# EAGLE board Imprimir (EAGLE 6.3)
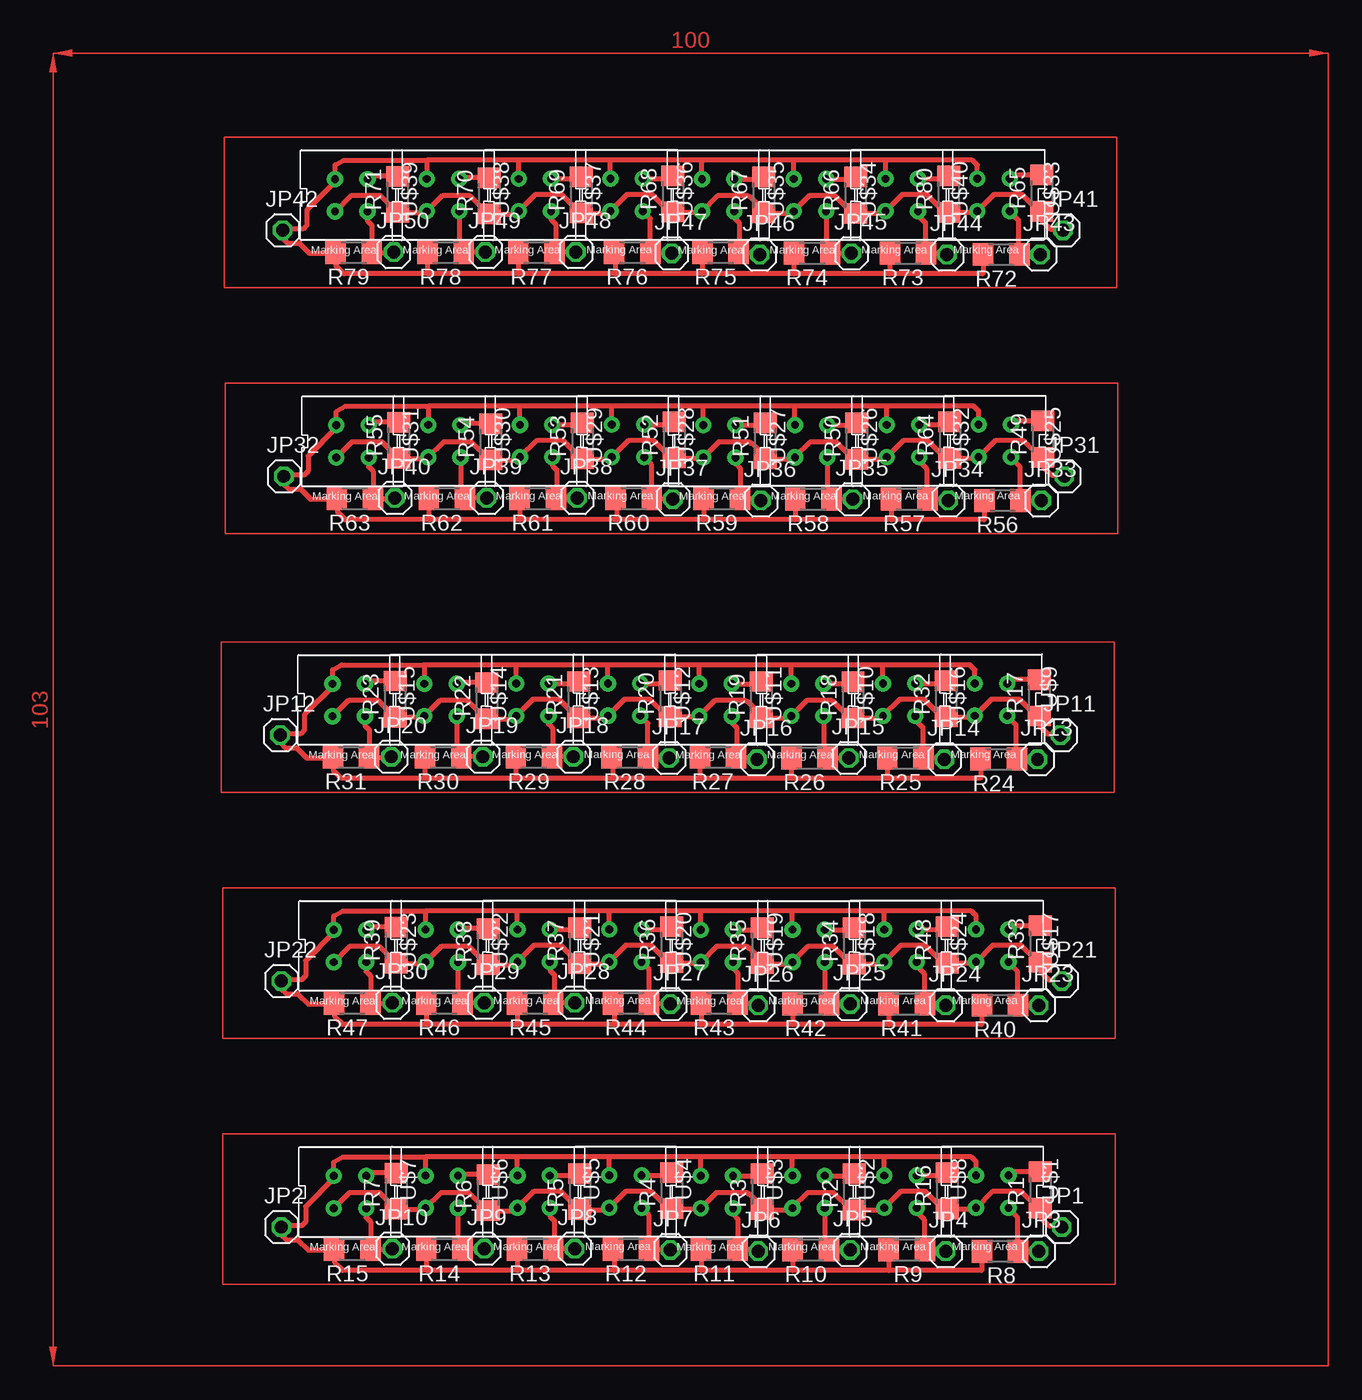
[diagram p0: board, top side]
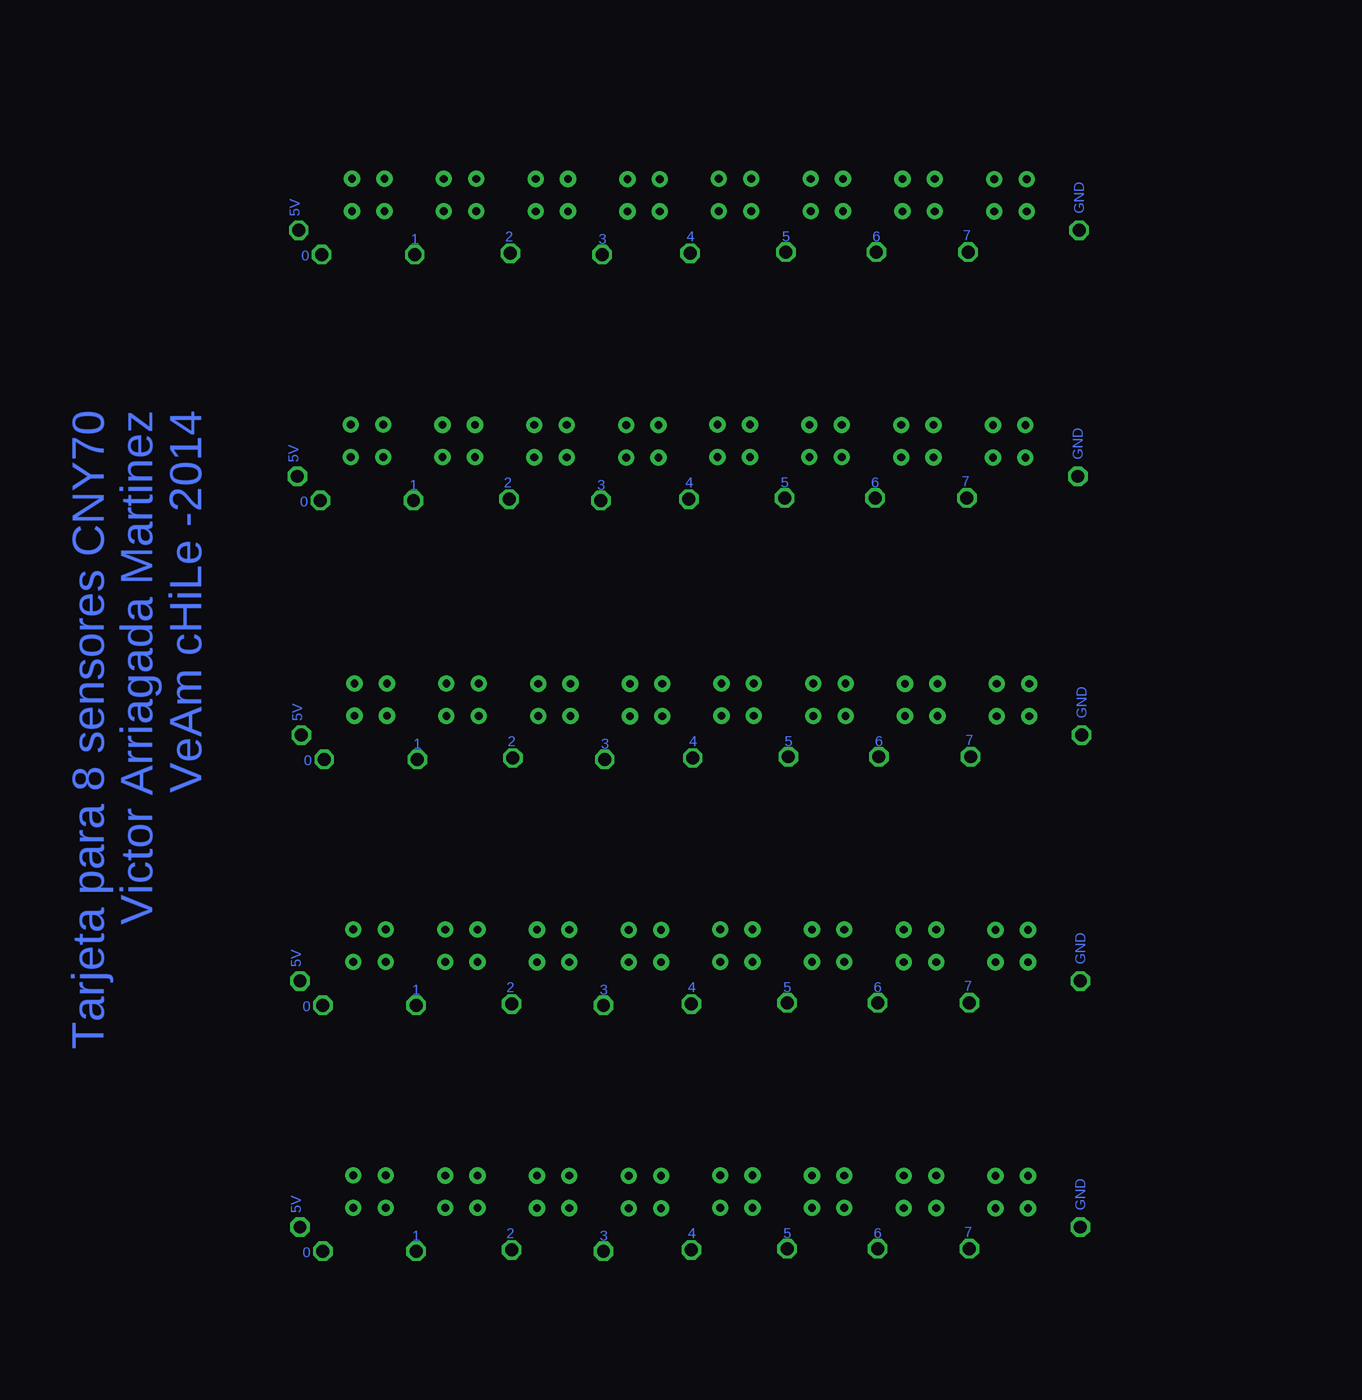
[diagram p1: board, bottom side, seen from below]

No outline drawn. Coordinates in mm, seen from the top.
Copper layers (1*16): Top 0.035mm / dielectric 1.5mm / Bottom 0.035mm
Design rules "default": minimum track width 10mil, minimum drill 24mil, track to track 8mil, track to pad 8mil, pad to pad 8mil, via to via 8mil, smd to smd 8mil, copper to edge 40mil, drill to drill 8mil, minimum pad ring 10mil, minimum via ring 8mil, stop-mask expansion 4mil, vias tented up to drill 0mil, thermal gap 10mil

## Footprints (pad centres in the part's own frame; a part is rotated, then mirrored left to right if it is on the bottom)
1X01 = drill 1.016 octagon: 1 0,0
R1206 = smd 1.6 x 1.803: 1 -1.422,0; 2 1.422,0
4 = drill 0.61 pad 1.27: A -1.27,1.27; C 1.27,-1.27; E 1.27,1.27; K -1.27,-1.27

## Placement (x,y rotation side)
JP1  5V  [1X01]  74.1,9.9 0 top
JP2  GND  [1X01]  12.9,9.9 0 top
JP3  D0  [1X01]  72.3,8 0 top
JP4  D1  [1X01]  65,8 0 top
JP5  D2  [1X01]  57.5,8.1 0 top
JP6  D3  [1X01]  50.3,8 0 top
JP7  D4  [1X01]  43.4,8.1 0 top
JP8  D5  [1X01]  35.9,8.2 0 top
JP9  D6  [1X01]  28.8,8.2 0 top
JP10  [1X01]  21.6,8.2 0 top
JP11  5V  [1X01]  74,48.5 0 top
JP12  GND  [1X01]  12.8,48.5 0 top
JP13  D0  [1X01]  72.2,46.6 0 top
JP14  D1  [1X01]  64.9,46.6 0 top
JP15  D2  [1X01]  57.4,46.7 0 top
JP16  D3  [1X01]  50.2,46.6 0 top
JP17  D4  [1X01]  43.3,46.7 0 top
JP18  D5  [1X01]  35.8,46.8 0 top
JP19  D6  [1X01]  28.7,46.8 0 top
JP20  [1X01]  21.5,46.8 0 top
JP21  5V  [1X01]  74.1,29.2 0 top
JP22  GND  [1X01]  12.9,29.2 0 top
JP23  D0  [1X01]  72.3,27.3 0 top
JP24  D1  [1X01]  65,27.3 0 top
JP25  D2  [1X01]  57.5,27.4 0 top
JP26  D3  [1X01]  50.3,27.3 0 top
JP27  D4  [1X01]  43.4,27.4 0 top
JP28  D5  [1X01]  35.9,27.5 0 top
JP29  D6  [1X01]  28.8,27.5 0 top
JP30  [1X01]  21.6,27.5 0 top
JP31  5V  [1X01]  74.3,68.8 0 top
JP32  GND  [1X01]  13.1,68.8 0 top
JP33  D0  [1X01]  72.5,66.9 0 top
JP34  D1  [1X01]  65.2,66.9 0 top
JP35  D2  [1X01]  57.7,67 0 top
JP36  D3  [1X01]  50.5,66.9 0 top
JP37  D4  [1X01]  43.6,67 0 top
JP38  D5  [1X01]  36.1,67.1 0 top
JP39  D6  [1X01]  29,67.1 0 top
JP40  [1X01]  21.8,67.1 0 top
JP41  5V  [1X01]  74.2,88.1 0 top
JP42  GND  [1X01]  13,88.1 0 top
JP43  D0  [1X01]  72.4,86.2 0 top
JP44  D1  [1X01]  65.1,86.2 0 top
JP45  D2  [1X01]  57.6,86.3 0 top
JP46  D3  [1X01]  50.4,86.2 0 top
JP47  D4  [1X01]  43.5,86.3 0 top
JP48  D5  [1X01]  36,86.4 0 top
JP49  D6  [1X01]  28.9,86.4 0 top
JP50  [1X01]  21.7,86.4 0 top
R1  220  [R1206]  72.43,12.82 90 top
R2  220  [R1206]  57.83,12.66 90 top
R3  220  [R1206]  50.63,12.68 90 top
R4  220  [R1206]  43.51,12.76 90 top
R5  220  [R1206]  36.31,12.68 90 top
R6  220  [R1206]  29.11,12.6 90 top
R7  220  [R1206]  21.91,12.72 90 top
R8  20k  [R1206]  69.26,8.01 180 top
R9  20k  [R1206]  61.94,8.11 180 top
R10  20k  [R1206]  54.42,8.11 180 top
R11  20k  [R1206]  47.24,8.16 180 top
R12  20k  [R1206]  40.32,8.16 180 top
R13  20k  [R1206]  32.8,8.16 180 top
R14  20k  [R1206]  25.68,8.16 180 top
R15  20k  [R1206]  18.46,8.16 180 top
R16  220  [R1206]  65.13,12.74 90 top
R17  220  [R1206]  72.33,51.42 90 top
R18  220  [R1206]  57.73,51.26 90 top
R19  220  [R1206]  50.53,51.28 90 top
R20  220  [R1206]  43.41,51.36 90 top
R21  220  [R1206]  36.21,51.28 90 top
R22  220  [R1206]  29.01,51.2 90 top
R23  220  [R1206]  21.81,51.32 90 top
R24  20k  [R1206]  69.16,46.61 180 top
R25  20k  [R1206]  61.84,46.71 180 top
R26  20k  [R1206]  54.32,46.71 180 top
R27  20k  [R1206]  47.14,46.76 180 top
R28  20k  [R1206]  40.22,46.76 180 top
R29  20k  [R1206]  32.7,46.76 180 top
R30  20k  [R1206]  25.58,46.76 180 top
R31  20k  [R1206]  18.36,46.76 180 top
R32  220  [R1206]  65.03,51.34 90 top
R33  220  [R1206]  72.43,32.12 90 top
R34  220  [R1206]  57.83,31.96 90 top
R35  220  [R1206]  50.63,31.98 90 top
R36  220  [R1206]  43.51,32.06 90 top
R37  220  [R1206]  36.31,31.98 90 top
R38  220  [R1206]  29.11,31.9 90 top
R39  220  [R1206]  21.91,32.02 90 top
R40  20k  [R1206]  69.26,27.31 180 top
R41  20k  [R1206]  61.94,27.41 180 top
R42  20k  [R1206]  54.42,27.41 180 top
R43  20k  [R1206]  47.24,27.46 180 top
R44  20k  [R1206]  40.32,27.46 180 top
R45  20k  [R1206]  32.8,27.46 180 top
R46  20k  [R1206]  25.68,27.46 180 top
R47  20k  [R1206]  18.46,27.46 180 top
R48  220  [R1206]  65.13,32.04 90 top
R49  220  [R1206]  72.63,71.72 90 top
R50  220  [R1206]  58.03,71.56 90 top
R51  220  [R1206]  50.83,71.58 90 top
R52  220  [R1206]  43.71,71.66 90 top
R53  220  [R1206]  36.51,71.58 90 top
R54  220  [R1206]  29.31,71.5 90 top
R55  220  [R1206]  22.11,71.62 90 top
R56  20k  [R1206]  69.46,66.91 180 top
R57  20k  [R1206]  62.14,67.01 180 top
R58  20k  [R1206]  54.62,67.01 180 top
R59  20k  [R1206]  47.44,67.06 180 top
R60  20k  [R1206]  40.52,67.06 180 top
R61  20k  [R1206]  33,67.06 180 top
R62  20k  [R1206]  25.88,67.06 180 top
R63  20k  [R1206]  18.66,67.06 180 top
R64  220  [R1206]  65.33,71.64 90 top
R65  220  [R1206]  72.53,91.02 90 top
R66  220  [R1206]  57.93,90.86 90 top
R67  220  [R1206]  50.73,90.88 90 top
R68  220  [R1206]  43.61,90.96 90 top
R69  220  [R1206]  36.41,90.88 90 top
R70  220  [R1206]  29.21,90.8 90 top
R71  220  [R1206]  22.01,90.92 90 top
R72  20k  [R1206]  69.36,86.21 180 top
R73  20k  [R1206]  62.04,86.31 180 top
R74  20k  [R1206]  54.52,86.31 180 top
R75  20k  [R1206]  47.34,86.36 180 top
R76  20k  [R1206]  40.42,86.36 180 top
R77  20k  [R1206]  32.9,86.36 180 top
R78  20k  [R1206]  25.78,86.36 180 top
R79  20k  [R1206]  18.56,86.36 180 top
R80  220  [R1206]  65.23,90.94 90 top
U$1  CNY70  [4]  68.65,12.68 270 top
U$2  CNY70  [4]  54.25,12.66 270 top
U$3  CNY70  [4]  47.05,12.65 270 top
U$4  CNY70  [4]  39.88,12.68 270 top
U$5  CNY70  [4]  32.68,12.67 270 top
U$6  CNY70  [4]  25.48,12.66 270 top
U$7  CNY70  [4]  18.28,12.65 270 top
U$8  CNY70  [4]  61.45,12.67 270 top
U$9  CNY70  [4]  68.55,51.28 270 top
U$10  CNY70  [4]  54.15,51.26 270 top
U$11  CNY70  [4]  46.95,51.25 270 top
U$12  CNY70  [4]  39.78,51.28 270 top
U$13  CNY70  [4]  32.58,51.27 270 top
U$14  CNY70  [4]  25.38,51.26 270 top
U$15  CNY70  [4]  18.18,51.25 270 top
U$16  CNY70  [4]  61.35,51.27 270 top
U$17  CNY70  [4]  68.65,31.98 270 top
U$18  CNY70  [4]  54.25,31.96 270 top
U$19  CNY70  [4]  47.05,31.95 270 top
U$20  CNY70  [4]  39.88,31.98 270 top
U$21  CNY70  [4]  32.68,31.97 270 top
U$22  CNY70  [4]  25.48,31.96 270 top
U$23  CNY70  [4]  18.28,31.95 270 top
U$24  CNY70  [4]  61.45,31.97 270 top
U$25  CNY70  [4]  68.85,71.58 270 top
U$26  CNY70  [4]  54.45,71.56 270 top
U$27  CNY70  [4]  47.25,71.55 270 top
U$28  CNY70  [4]  40.08,71.58 270 top
U$29  CNY70  [4]  32.88,71.57 270 top
U$30  CNY70  [4]  25.68,71.56 270 top
U$31  CNY70  [4]  18.48,71.55 270 top
U$32  CNY70  [4]  61.65,71.57 270 top
U$33  CNY70  [4]  68.75,90.88 270 top
U$34  CNY70  [4]  54.35,90.86 270 top
U$35  CNY70  [4]  47.15,90.85 270 top
U$36  CNY70  [4]  39.98,90.88 270 top
U$37  CNY70  [4]  32.78,90.87 270 top
U$38  CNY70  [4]  25.58,90.86 270 top
U$39  CNY70  [4]  18.38,90.85 270 top
U$40  CNY70  [4]  61.55,90.87 270 top

## Library data of the parts
JP1-JP50 = pinhead
R1-R80 = rcl
U$1-U$40 = cny70

## Nets
N$1: R1.2 U$1.A
N$2: R2.2 U$2.A
N$3: R3.2 U$3.A
N$4: R4.2 U$4.A
N$5: R5.2 U$5.A
N$6: R6.2 U$6.A
N$7: R7.2 U$7.A
N$8: JP10.1 R15.1 U$7.E
N$9: JP9.1 R14.1 U$6.E
N$10: JP8.1 R13.1 U$5.E
N$11: JP7.1 R12.1 U$4.E
N$12: JP6.1 R11.1 U$3.E
N$13: JP5.1 R10.1 U$2.E
N$14: JP4.1 R9.1 U$8.E
N$15: JP3.1 R8.1 U$1.E
N$16: JP1.1 R1.1 R2.1 R3.1 R4.1 R5.1 R6.1 R7.1 R16.1 U$1.C U$2.C U$3.C U$4.C U$5.C U$6.C U$7.C U$8.C
N$17: JP2.1 R8.2 R9.2 R10.2 R11.2 R12.2 R13.2 R14.2 R15.2 U$1.K U$2.K U$3.K U$4.K U$5.K U$6.K U$7.K U$8.K
N$18: R16.2 U$8.A
N$30: R17.2 U$9.A
N$31: R18.2 U$10.A
N$32: R19.2 U$11.A
N$33: R20.2 U$12.A
N$34: R21.2 U$13.A
N$35: R22.2 U$14.A
N$36: R23.2 U$15.A
N$37: JP20.1 R31.1 U$15.E
N$38: JP19.1 R30.1 U$14.E
N$39: JP18.1 R29.1 U$13.E
N$40: JP17.1 R28.1 U$12.E
N$41: JP16.1 R27.1 U$11.E
N$42: JP15.1 R26.1 U$10.E
N$43: JP14.1 R25.1 U$16.E
N$44: JP13.1 R24.1 U$9.E
N$45: JP11.1 R17.1 R18.1 R19.1 R20.1 R21.1 R22.1 R23.1 R32.1 U$9.C U$10.C U$11.C U$12.C U$13.C U$14.C U$15.C U$16.C
N$46: JP12.1 R24.2 R25.2 R26.2 R27.2 R28.2 R29.2 R30.2 R31.2 U$9.K U$10.K U$11.K U$12.K U$13.K U$14.K U$15.K U$16.K
N$47: R32.2 U$16.A
N$59: R33.2 U$17.A
N$60: R34.2 U$18.A
N$61: R35.2 U$19.A
N$62: R36.2 U$20.A
N$63: R37.2 U$21.A
N$64: R38.2 U$22.A
N$65: R39.2 U$23.A
N$66: JP30.1 R47.1 U$23.E
N$67: JP29.1 R46.1 U$22.E
N$68: JP28.1 R45.1 U$21.E
N$69: JP27.1 R44.1 U$20.E
N$70: JP26.1 R43.1 U$19.E
N$71: JP25.1 R42.1 U$18.E
N$72: JP24.1 R41.1 U$24.E
N$73: JP23.1 R40.1 U$17.E
N$74: JP21.1 R33.1 R34.1 R35.1 R36.1 R37.1 R38.1 R39.1 R48.1 U$17.C U$18.C U$19.C U$20.C U$21.C U$22.C U$23.C U$24.C
N$75: JP22.1 R40.2 R41.2 R42.2 R43.2 R44.2 R45.2 R46.2 R47.2 U$17.K U$18.K U$19.K U$20.K U$21.K U$22.K U$23.K U$24.K
N$76: R48.2 U$24.A
N$89: R49.2 U$25.A
N$91: R50.2 U$26.A
N$92: R51.2 U$27.A
N$95: R52.2 U$28.A
N$97: R53.2 U$29.A
N$98: R54.2 U$30.A
N$99: R55.2 U$31.A
N$101: JP40.1 R63.1 U$31.E
N$102: JP39.1 R62.1 U$30.E
N$103: JP38.1 R61.1 U$29.E
N$104: JP37.1 R60.1 U$28.E
N$105: JP36.1 R59.1 U$27.E
N$106: JP35.1 R58.1 U$26.E
N$107: JP34.1 R57.1 U$32.E
N$108: JP33.1 R56.1 U$25.E
N$109: JP31.1 R49.1 R50.1 R51.1 R52.1 R53.1 R54.1 R55.1 R64.1 U$25.C U$26.C U$27.C U$28.C U$29.C U$30.C U$31.C U$32.C
N$110: JP32.1 R56.2 R57.2 R58.2 R59.2 R60.2 R61.2 R62.2 R63.2 U$25.K U$26.K U$27.K U$28.K U$29.K U$30.K U$31.K U$32.K
N$111: R64.2 U$32.A
N$117: R65.2 U$33.A
N$118: R66.2 U$34.A
N$119: R67.2 U$35.A
N$120: R68.2 U$36.A
N$121: R69.2 U$37.A
N$122: R70.2 U$38.A
N$123: R71.2 U$39.A
N$124: JP50.1 R79.1 U$39.E
N$125: JP49.1 R78.1 U$38.E
N$126: JP48.1 R77.1 U$37.E
N$127: JP47.1 R76.1 U$36.E
N$128: JP46.1 R75.1 U$35.E
N$129: JP45.1 R74.1 U$34.E
N$130: JP44.1 R73.1 U$40.E
N$131: JP43.1 R72.1 U$33.E
N$132: JP41.1 R65.1 R66.1 R67.1 R68.1 R69.1 R70.1 R71.1 R80.1 U$33.C U$34.C U$35.C U$36.C U$37.C U$38.C U$39.C U$40.C
N$133: JP42.1 R72.2 R73.2 R74.2 R75.2 R76.2 R77.2 R78.2 R79.2 U$33.K U$34.K U$35.K U$36.K U$37.K U$38.K U$39.K U$40.K
N$134: R80.2 U$40.A

## Tracks (layer width: path | path; a pad name or v marks a point on that pad's centre or on a via)
N$1
  Top 0.406: R1.2 70.21,14.24 U$1.A
N$2
  Top 0.406: U$2.A 57.68,13.93 R2.2
N$3
  Top 0.406: U$3.A 50.45,13.92 R3.2
N$4
  Top 0.406: U$4.A 43.28,13.95 R4.2
N$5
  Top 0.406: U$5.A 36.15,13.94 R5.2
N$6
  Top 0.406: R6.2 26.84,14.02 U$6.A
N$7
  Top 0.406: R7.2 19.77,14.14 U$7.A
N$8
  Top 0.406: U$7.E 19.55,10.65 19.9,10.3 19.9,8.18 R15.1 21.56,8.16 JP10.1
N$9
  Top 0.406: JP9.1 27.14,8.2 R14.1 26.75,8.51 U$6.E
N$10
  Top 0.406: JP8.1 34.26,8.2 R13.1 34.3,8.24 34.3,10.4 33.95,10.75 U$5.E
N$11
  Top 0.406: JP7.1 43.34,8.16 R12.1 41.74,10.82 U$4.E
N$12
  Top 0.406: JP6.1 50.14,8.16 R11.1 48.7,8.2 48.7,10.5 48.32,10.88 U$3.E
N$13
  Top 0.406: JP5.1 R10.1 55.52,8.43 U$2.E
N$14
  Top 0.406: JP4.1 64.89,8.11 R9.1 63.3,8.17 63.3,10.5 62.72,11.08 U$8.E
N$15
  Top 0.406: U$1.E 69.92,11.38 70.6,10.7 70.6,8.09 R8.1 JP3.1
N$16
  Top 0.406: U$7.C 18.23,12.6 20.6,12.6 R7.1 24.12,11.3 U$6.C 25.42,12.6 27.6,12.6 29,11.2 29.1,11.2 R6.1 31.19,11.18 U$5.C 32.71,12.7 34.8,12.7 36.24,11.26 R5.1 38.46,11.26 U$4.C 39.9,12.7 41.9,12.7 43.26,11.34 R4.1 45.74,11.34 U$3.C 47,12.6 49.4,12.6 49.5,12.5 49.6,12.5 50.63,11.47 R3.1 52.85,11.26 U$2.C 54.19,12.6 56.2,12.6 57.56,11.24 R2.1 60.02,11.24 U$8.C 61.48,12.7 63.4,12.7 64.78,11.32 R16.1 67.29,11.32 U$1.C 68.67,12.7 70.9,12.7 72.2,11.4 R1.1 72.43,10.67 73.1,10 74,10 JP1.1 74.13,9.93
N$17
  Top 0.406: 24.2,15.4 17.7,15.4 17.01,15.01 U$7.K 17.01,13.71 14.8,11.5 14.8,10.3 14.5,10 13,10 JP2.1 12.9,9.3 13.3,8.9 14.2,8.9 15,8.1 16.98,8.1 R15.2 17.1,8.1 17.1,7.1 17.7,6.5 24.3,6.5 | 24.2,15.4 U$6.K | U$5.K 31.41,15.39 31.4,15.4 | 31.4,15.4 24.2,15.4 | U$4.K 38.61,15.39 38.7,15.4 | 38.7,15.4 31.4,15.4 | U$3.K 45.78,15.38 45.9,15.4 | 45.9,15.4 38.7,15.4 | U$2.K 52.98,15.38 53,15.4 | 53,15.4 45.9,15.4 | U$8.K 60.18,15.38 60.3,15.4 | 60.3,15.4 53,15.4 | U$1.K 67.38,15.02 67,15.4 60.3,15.4 | R14.2 24.26,6.54 24.3,6.5 | R13.2 31.38,6.52 31.4,6.5 | 31.4,6.5 24.3,6.5 | R12.2 38.94,8.16 39,8.1 39,6.5 | 39,6.5 31.4,6.5 | R11.2 45.82,6.52 45.8,6.5 | 45.8,6.5 39,6.5 | R10.2 53,6.5 | 53,6.5 45.8,6.5 | R9.2 60.52,6.52 | 60.52,6.52 60.5,6.5 53,6.5 | R8.2 67.84,6.54 67.8,6.5 60.54,6.5 60.52,6.52
N$18
  Top 0.406: 64.73,13.94 R16.2 64.91,13.94 U$8.A
N$19  (via drill 0.6)
  other vias: 12.9,9.9
N$20  (via drill 0.6)
  other vias: 21.6,8.2
N$21  (via drill 0.6)
  other vias: 28.8,8.2
N$22  (via drill 0.6)
  other vias: 35.9,8.2
N$23  (via drill 0.6)
  other vias: 43.4,8.1
N$24  (via drill 0.6)
  other vias: 50.3,8
N$25  (via drill 0.6)
  other vias: 57.5,8.1
N$26  (via drill 0.6)
  other vias: 65,8
N$27  (via drill 0.6)
  other vias: 72.3,8
N$28  (via drill 0.6)
  other vias: 74.1,9.9
N$29
  Top 0.1: 8.3,5.4 78.3,5.4 78.3,17.2 8.3,17.2 8.3,5.4
N$30
  Top 0.406: R17.2 70.11,52.84 U$9.A
N$31
  Top 0.406: U$10.A 57.58,52.53 R18.2
N$32
  Top 0.406: U$11.A 50.35,52.52 R19.2
N$33
  Top 0.406: U$12.A 43.18,52.55 R20.2
N$34
  Top 0.406: U$13.A 36.05,52.54 R21.2
N$35
  Top 0.406: R22.2 26.74,52.62 U$14.A
N$36
  Top 0.406: R23.2 19.67,52.74 U$15.A
N$37
  Top 0.406: U$15.E 19.45,49.25 19.8,48.9 19.8,46.78 R31.1 21.46,46.76 JP20.1
N$38
  Top 0.406: JP19.1 27.04,46.8 R30.1 26.65,47.11 U$14.E
N$39
  Top 0.406: JP18.1 34.16,46.8 R29.1 34.2,46.84 34.2,49 33.85,49.35 U$13.E
N$40
  Top 0.406: JP17.1 43.24,46.76 R28.1 41.64,49.42 U$12.E
N$41
  Top 0.406: JP16.1 50.04,46.76 R27.1 48.6,46.8 48.6,49.1 48.22,49.48 U$11.E
N$42
  Top 0.406: JP15.1 R26.1 55.42,47.03 U$10.E
N$43
  Top 0.406: JP14.1 64.79,46.71 R25.1 63.2,46.77 63.2,49.1 62.62,49.68 U$16.E
N$44
  Top 0.406: U$9.E 69.82,49.98 70.5,49.3 70.5,46.69 R24.1 JP13.1
N$45
  Top 0.406: U$15.C 18.13,51.2 20.5,51.2 R23.1 24.02,49.9 U$14.C 25.32,51.2 27.5,51.2 28.9,49.8 29,49.8 R22.1 31.09,49.78 U$13.C 32.61,51.3 34.7,51.3 36.14,49.86 R21.1 38.36,49.86 U$12.C 39.8,51.3 41.8,51.3 43.16,49.94 R20.1 45.64,49.94 U$11.C 46.9,51.2 49.3,51.2 49.4,51.1 49.5,51.1 50.53,50.07 R19.1 52.75,49.86 U$10.C 54.09,51.2 56.1,51.2 57.46,49.84 R18.1 59.92,49.84 U$16.C 61.38,51.3 63.3,51.3 64.68,49.92 R32.1 67.19,49.92 U$9.C 68.57,51.3 70.8,51.3 72.1,50 R17.1 72.33,49.27 73,48.6 73.9,48.6 JP11.1 74.03,48.53
N$46
  Top 0.406: 24.1,54 17.6,54 16.91,53.61 U$15.K 16.91,52.31 14.7,50.1 14.7,48.9 14.4,48.6 12.9,48.6 JP12.1 12.8,47.9 13.2,47.5 14.1,47.5 14.9,46.7 16.88,46.7 R31.2 17,46.7 17,45.7 17.6,45.1 24.2,45.1 | 24.1,54 U$14.K | U$13.K 31.31,53.99 31.3,54 | 31.3,54 24.1,54 | U$12.K 38.51,53.99 38.6,54 | 38.6,54 31.3,54 | U$11.K 45.68,53.98 45.8,54 | 45.8,54 38.6,54 | U$10.K 52.88,53.98 52.9,54 | 52.9,54 45.8,54 | U$16.K 60.08,53.98 60.2,54 | 60.2,54 52.9,54 | U$9.K 67.28,53.62 66.9,54 60.2,54 | R30.2 24.16,45.14 24.2,45.1 | R29.2 31.28,45.12 31.3,45.1 | 31.3,45.1 24.2,45.1 | R28.2 38.84,46.76 38.9,46.7 38.9,45.1 | 38.9,45.1 31.3,45.1 | R27.2 45.72,45.12 45.7,45.1 | 45.7,45.1 38.9,45.1 | R26.2 52.9,45.1 | 52.9,45.1 45.7,45.1 | R25.2 60.42,45.12 | 60.42,45.12 60.4,45.1 52.9,45.1 | R24.2 67.74,45.14 67.7,45.1 60.44,45.1 60.42,45.12
N$47
  Top 0.406: 64.63,52.54 R32.2 64.81,52.54 U$16.A
N$48  (via drill 0.6)
  other vias: 12.8,48.5
N$49  (via drill 0.6)
  other vias: 21.5,46.8
N$50  (via drill 0.6)
  other vias: 28.7,46.8
N$51  (via drill 0.6)
  other vias: 35.8,46.8
N$52  (via drill 0.6)
  other vias: 43.3,46.7
N$53  (via drill 0.6)
  other vias: 50.2,46.6
N$54  (via drill 0.6)
  other vias: 57.4,46.7
N$55  (via drill 0.6)
  other vias: 64.9,46.6
N$56  (via drill 0.6)
  other vias: 72.2,46.6
N$57  (via drill 0.6)
  other vias: 74,48.5
N$58
  Top 0.1: 8.2,44 78.2,44 78.2,55.8 8.2,55.8 8.2,44
N$59
  Top 0.406: R33.2 70.21,33.54 U$17.A
N$60
  Top 0.406: U$18.A 57.68,33.23 R34.2
N$61
  Top 0.406: U$19.A 50.45,33.22 R35.2
N$62
  Top 0.406: U$20.A 43.28,33.25 R36.2
N$63
  Top 0.406: U$21.A 36.15,33.24 R37.2
N$64
  Top 0.406: R38.2 26.84,33.32 U$22.A
N$65
  Top 0.406: R39.2 19.77,33.44 U$23.A
N$66
  Top 0.406: U$23.E 19.55,29.95 19.9,29.6 19.9,27.48 R47.1 21.56,27.46 JP30.1
N$67
  Top 0.406: JP29.1 27.14,27.5 R46.1 26.75,27.81 U$22.E
N$68
  Top 0.406: JP28.1 34.26,27.5 R45.1 34.3,27.54 34.3,29.7 33.95,30.05 U$21.E
N$69
  Top 0.406: JP27.1 43.34,27.46 R44.1 41.74,30.12 U$20.E
N$70
  Top 0.406: JP26.1 50.14,27.46 R43.1 48.7,27.5 48.7,29.8 48.32,30.18 U$19.E
N$71
  Top 0.406: JP25.1 R42.1 55.52,27.73 U$18.E
N$72
  Top 0.406: JP24.1 64.89,27.41 R41.1 63.3,27.47 63.3,29.8 62.72,30.38 U$24.E
N$73
  Top 0.406: U$17.E 69.92,30.68 70.6,30 70.6,27.39 R40.1 JP23.1
N$74
  Top 0.406: U$23.C 18.23,31.9 20.6,31.9 R39.1 24.12,30.6 U$22.C 25.42,31.9 27.6,31.9 29,30.5 29.1,30.5 R38.1 31.19,30.48 U$21.C 32.71,32 34.8,32 36.24,30.56 R37.1 38.46,30.56 U$20.C 39.9,32 41.9,32 43.26,30.64 R36.1 45.74,30.64 U$19.C 47,31.9 49.4,31.9 49.5,31.8 49.6,31.8 50.63,30.77 R35.1 52.85,30.56 U$18.C 54.19,31.9 56.2,31.9 57.56,30.54 R34.1 60.02,30.54 U$24.C 61.48,32 63.4,32 64.78,30.62 R48.1 67.29,30.62 U$17.C 68.67,32 70.9,32 72.2,30.7 R33.1 72.43,29.97 73.1,29.3 74,29.3 JP21.1 74.13,29.23
N$75
  Top 0.406: 24.2,34.7 17.7,34.7 17.01,34.31 U$23.K 17.01,33.01 14.8,30.8 14.8,29.6 14.5,29.3 13,29.3 JP22.1 12.9,28.6 13.3,28.2 14.2,28.2 15,27.4 16.98,27.4 R47.2 17.1,27.4 17.1,26.4 17.7,25.8 24.3,25.8 | 24.2,34.7 U$22.K | U$21.K 31.41,34.69 31.4,34.7 | 31.4,34.7 24.2,34.7 | U$20.K 38.61,34.69 38.7,34.7 | 38.7,34.7 31.4,34.7 | U$19.K 45.78,34.68 45.9,34.7 | 45.9,34.7 38.7,34.7 | U$18.K 52.98,34.68 53,34.7 | 53,34.7 45.9,34.7 | U$24.K 60.18,34.68 60.3,34.7 | 60.3,34.7 53,34.7 | U$17.K 67.38,34.32 67,34.7 60.3,34.7 | R46.2 24.26,25.84 24.3,25.8 | R45.2 31.38,25.82 31.4,25.8 | 31.4,25.8 24.3,25.8 | R44.2 38.94,27.46 39,27.4 39,25.8 | 39,25.8 31.4,25.8 | R43.2 45.82,25.82 45.8,25.8 | 45.8,25.8 39,25.8 | R42.2 53,25.8 | 53,25.8 45.8,25.8 | R41.2 60.52,25.82 | 60.52,25.82 60.5,25.8 53,25.8 | R40.2 67.84,25.84 67.8,25.8 60.54,25.8 60.52,25.82
N$76
  Top 0.406: 64.73,33.24 R48.2 64.91,33.24 U$24.A
N$77  (via drill 0.6)
  other vias: 12.9,29.2
N$78  (via drill 0.6)
  other vias: 21.6,27.5
N$79  (via drill 0.6)
  other vias: 28.8,27.5
N$80  (via drill 0.6)
  other vias: 35.9,27.5
N$81  (via drill 0.6)
  other vias: 43.4,27.4
N$82  (via drill 0.6)
  other vias: 50.3,27.3
N$83  (via drill 0.6)
  other vias: 57.5,27.4
N$84  (via drill 0.6)
  other vias: 65,27.3
N$85  (via drill 0.6)
  other vias: 72.3,27.3
N$86  (via drill 0.6)
  other vias: 74.1,29.2
N$87
  Top 0.1: 8.3,24.7 78.3,24.7 78.3,36.5 8.3,36.5 8.3,24.7
N$89
  Top 0.406: R49.2 70.41,73.14 U$25.A
N$91
  Top 0.406: U$26.A 57.88,72.83 R50.2
N$92
  Top 0.406: U$27.A 50.65,72.82 R51.2
N$95
  Top 0.406: U$28.A 43.48,72.85 R52.2
N$97
  Top 0.406: U$29.A 36.35,72.84 R53.2
N$98
  Top 0.406: R54.2 27.04,72.92 U$30.A
N$99
  Top 0.406: R55.2 19.97,73.04 U$31.A
N$101
  Top 0.406: U$31.E 19.75,69.55 20.1,69.2 20.1,67.08 R63.1 21.76,67.06 JP40.1
N$102
  Top 0.406: JP39.1 27.34,67.1 R62.1 26.95,67.41 U$30.E
N$103
  Top 0.406: JP38.1 34.46,67.1 R61.1 34.5,67.14 34.5,69.3 34.15,69.65 U$29.E
N$104
  Top 0.406: JP37.1 43.54,67.06 R60.1 41.94,69.72 U$28.E
N$105
  Top 0.406: JP36.1 50.34,67.06 R59.1 48.9,67.1 48.9,69.4 48.52,69.78 U$27.E
N$106
  Top 0.406: JP35.1 R58.1 55.72,67.33 U$26.E
N$107
  Top 0.406: JP34.1 65.09,67.01 R57.1 63.5,67.07 63.5,69.4 62.92,69.98 U$32.E
N$108
  Top 0.406: U$25.E 70.12,70.28 70.8,69.6 70.8,66.99 R56.1 JP33.1
N$109
  Top 0.406: U$31.C 18.43,71.5 20.8,71.5 R55.1 24.32,70.2 U$30.C 25.62,71.5 27.8,71.5 29.2,70.1 29.3,70.1 R54.1 31.39,70.08 U$29.C 32.91,71.6 35,71.6 36.44,70.16 R53.1 38.66,70.16 U$28.C 40.1,71.6 42.1,71.6 43.46,70.24 R52.1 45.94,70.24 U$27.C 47.2,71.5 49.6,71.5 49.7,71.4 49.8,71.4 50.83,70.37 R51.1 53.05,70.16 U$26.C 54.39,71.5 56.4,71.5 57.76,70.14 R50.1 60.22,70.14 U$32.C 61.68,71.6 63.6,71.6 64.98,70.22 R64.1 67.49,70.22 U$25.C 68.87,71.6 71.1,71.6 72.4,70.3 R49.1 72.63,69.57 73.3,68.9 74.2,68.9 JP31.1 74.33,68.83
N$110
  Top 0.406: 24.4,74.3 17.9,74.3 17.21,73.91 U$31.K 17.21,72.61 15,70.4 15,69.2 14.7,68.9 13.2,68.9 JP32.1 13.1,68.2 13.5,67.8 14.4,67.8 15.2,67 17.18,67 R63.2 17.3,67 17.3,66 17.9,65.4 24.5,65.4 | 24.4,74.3 U$30.K | U$29.K 31.61,74.29 31.6,74.3 | 31.6,74.3 24.4,74.3 | U$28.K 38.81,74.29 38.9,74.3 | 38.9,74.3 31.6,74.3 | U$27.K 45.98,74.28 46.1,74.3 | 46.1,74.3 38.9,74.3 | U$26.K 53.18,74.28 53.2,74.3 | 53.2,74.3 46.1,74.3 | U$32.K 60.38,74.28 60.5,74.3 | 60.5,74.3 53.2,74.3 | U$25.K 67.58,73.92 67.2,74.3 60.5,74.3 | R62.2 24.46,65.44 24.5,65.4 | R61.2 31.58,65.42 31.6,65.4 | 31.6,65.4 24.5,65.4 | R60.2 39.14,67.06 39.2,67 39.2,65.4 | 39.2,65.4 31.6,65.4 | R59.2 46.02,65.42 46,65.4 | 46,65.4 39.2,65.4 | R58.2 53.2,65.4 | 53.2,65.4 46,65.4 | R57.2 60.72,65.42 | 60.72,65.42 60.7,65.4 53.2,65.4 | R56.2 68.04,65.44 68,65.4 60.74,65.4 60.72,65.42
N$111
  Top 0.406: 64.93,72.84 R64.2 65.11,72.84 U$32.A
N$112  (via drill 0.6)
  other vias: 13.1,68.8
N$113  (via drill 0.6)
  other vias: 21.8,67.1
N$114  (via drill 0.6)
  other vias: 29,67.1
N$115  (via drill 0.6)
  other vias: 36.1,67.1
N$116  (via drill 0.6)
  other vias: 43.6,67
N$117
  Top 0.406: R65.2 70.31,92.44 U$33.A
N$118
  Top 0.406: U$34.A 57.78,92.13 R66.2
N$119
  Top 0.406: U$35.A 50.55,92.12 R67.2
N$120
  Top 0.406: U$36.A 43.38,92.15 R68.2
N$121
  Top 0.406: U$37.A 36.25,92.14 R69.2
N$122
  Top 0.406: R70.2 26.94,92.22 U$38.A
N$123
  Top 0.406: R71.2 19.87,92.34 U$39.A
N$124
  Top 0.406: U$39.E 19.65,88.85 20,88.5 20,86.38 R79.1 21.66,86.36 JP50.1
N$125
  Top 0.406: JP49.1 27.24,86.4 R78.1 26.85,86.71 U$38.E
N$126
  Top 0.406: JP48.1 34.36,86.4 R77.1 34.4,86.44 34.4,88.6 34.05,88.95 U$37.E
N$127
  Top 0.406: JP47.1 43.44,86.36 R76.1 41.84,89.02 U$36.E
N$128
  Top 0.406: JP46.1 50.24,86.36 R75.1 48.8,86.4 48.8,88.7 48.42,89.08 U$35.E
N$129
  Top 0.406: JP45.1 R74.1 55.62,86.63 U$34.E
N$130
  Top 0.406: JP44.1 64.99,86.31 R73.1 63.4,86.37 63.4,88.7 62.82,89.28 U$40.E
N$131
  Top 0.406: U$33.E 70.02,89.58 70.7,88.9 70.7,86.29 R72.1 JP43.1
N$132
  Top 0.406: U$39.C 18.33,90.8 20.7,90.8 R71.1 24.22,89.5 U$38.C 25.52,90.8 27.7,90.8 29.1,89.4 29.2,89.4 R70.1 31.29,89.38 U$37.C 32.81,90.9 34.9,90.9 36.34,89.46 R69.1 38.56,89.46 U$36.C 40,90.9 42,90.9 43.36,89.54 R68.1 45.84,89.54 U$35.C 47.1,90.8 49.5,90.8 49.6,90.7 49.7,90.7 50.73,89.67 R67.1 52.95,89.46 U$34.C 54.29,90.8 56.3,90.8 57.66,89.44 R66.1 60.12,89.44 U$40.C 61.58,90.9 63.5,90.9 64.88,89.52 R80.1 67.39,89.52 U$33.C 68.77,90.9 71,90.9 72.3,89.6 R65.1 72.53,88.87 73.2,88.2 74.1,88.2 JP41.1 74.23,88.13
N$133
  Top 0.406: 24.3,93.6 17.8,93.6 17.11,93.21 U$39.K 17.11,91.91 14.9,89.7 14.9,88.5 14.6,88.2 13.1,88.2 JP42.1 13,87.5 13.4,87.1 14.3,87.1 15.1,86.3 17.08,86.3 R79.2 17.2,86.3 17.2,85.3 17.8,84.7 24.4,84.7 | 24.3,93.6 U$38.K | U$37.K 31.51,93.59 31.5,93.6 | 31.5,93.6 24.3,93.6 | U$36.K 38.71,93.59 38.8,93.6 | 38.8,93.6 31.5,93.6 | U$35.K 45.88,93.58 46,93.6 | 46,93.6 38.8,93.6 | U$34.K 53.08,93.58 53.1,93.6 | 53.1,93.6 46,93.6 | U$40.K 60.28,93.58 60.4,93.6 | 60.4,93.6 53.1,93.6 | U$33.K 67.48,93.22 67.1,93.6 60.4,93.6 | R78.2 24.36,84.74 24.4,84.7 | R77.2 31.48,84.72 31.5,84.7 | 31.5,84.7 24.4,84.7 | R76.2 39.04,86.36 39.1,86.3 39.1,84.7 | 39.1,84.7 31.5,84.7 | R75.2 45.92,84.72 45.9,84.7 | 45.9,84.7 39.1,84.7 | R74.2 53.1,84.7 | 53.1,84.7 45.9,84.7 | R73.2 60.62,84.72 | 60.62,84.72 60.6,84.7 53.1,84.7 | R72.2 67.94,84.74 67.9,84.7 60.64,84.7 60.62,84.72
N$134
  Top 0.406: 64.83,92.14 R80.2 65.01,92.14 U$40.A
N$135  (via drill 0.6)
  other vias: 13,88.1
N$136  (via drill 0.6)
  other vias: 21.7,86.4
N$137  (via drill 0.6)
  other vias: 28.9,86.4
N$138  (via drill 0.6)
  other vias: 36,86.4
N$139  (via drill 0.6)
  other vias: 43.5,86.3
N$140  (via drill 0.6)
  other vias: 50.4,86.2
N$141  (via drill 0.6)
  other vias: 57.6,86.3
N$142  (via drill 0.6)
  other vias: 65.1,86.2
N$143  (via drill 0.6)
  other vias: 72.4,86.2
N$144  (via drill 0.6)
  other vias: 74.2,88.1
N$145
  Top 0.1: 8.4,83.6 78.4,83.6 78.4,95.4 8.4,95.4 8.4,83.6
N$146  (via drill 0.6)
  other vias: 50.5,66.9
N$147  (via drill 0.6)
  other vias: 57.7,67
N$148  (via drill 0.6)
  other vias: 65.2,66.9
N$149  (via drill 0.6)
  other vias: 72.5,66.9
N$150  (via drill 0.6)
  other vias: 74.3,68.8
N$151
  Top 0.1: 8.5,64.3 78.5,64.3 78.5,76.1 8.5,76.1 8.5,64.3
(copper drawn outside any net)
  shapes: Top area x2

## Text on the board
Bottom: GND | 5V | 7 | 6 | 5 | 4 | 3 | 2 | 1 | 0 | Tarjeta para 8 sensores CNY70 / Victor Arriagada Martinez / VeAm cHiLe -2014 | GND | 5V | 7 | 6 | 5 | 4 | 3 | 2 | 1 | 0 | GND | 5V | 7 | 6 | 5 | 4 | 2 | 3 | 1 | 0 | GND | 5V | 7 | 6 | 5 | 4 | 3 | 2 | 1 | 0 | GND | 5V | 7 | 6 | 5 | 4 | 3 | 2 | 1 | 0